# Altium PCB Круглов_ИУ4-83Б_ДЗ_БП.PcbDoc
Units mm, origin at the board's own origin, x right, y up, seen from the top; angles counter-clockwise.
Board outline 87.5 x 50 mm, 2 copper layers (Top Layer, Bottom Layer), stack 2.071 mm thick; 18 components, 15 nets, 64 pads, 11 vias.
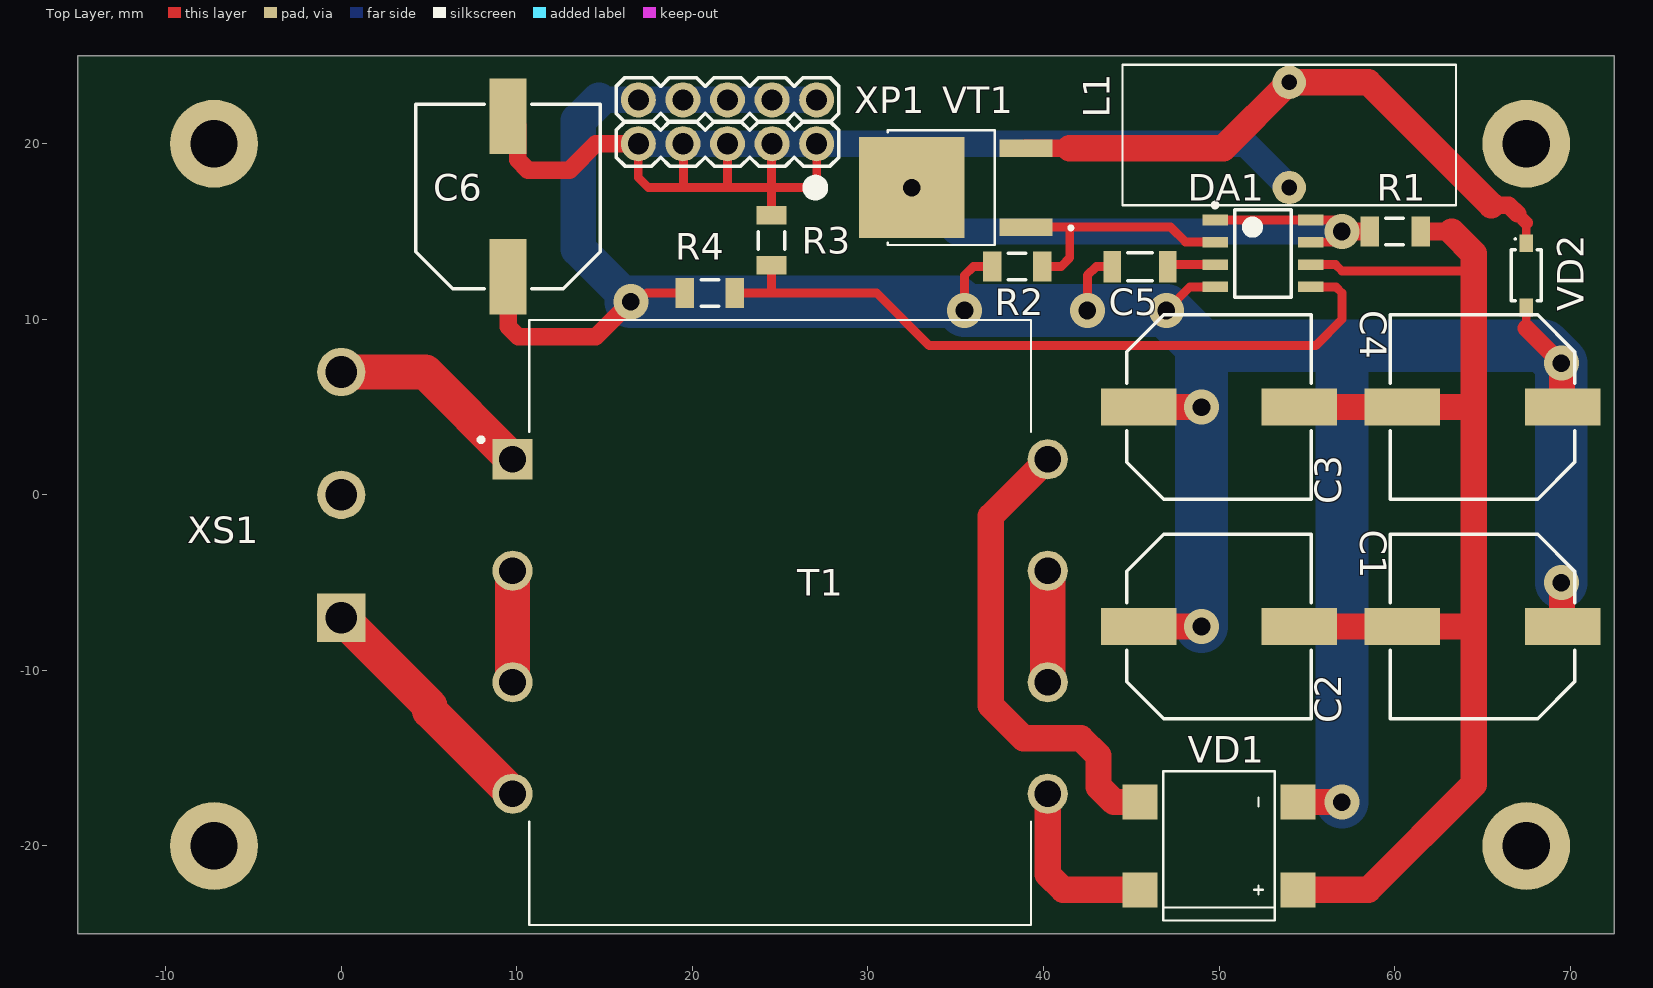
[diagram p0: Top Layer view]
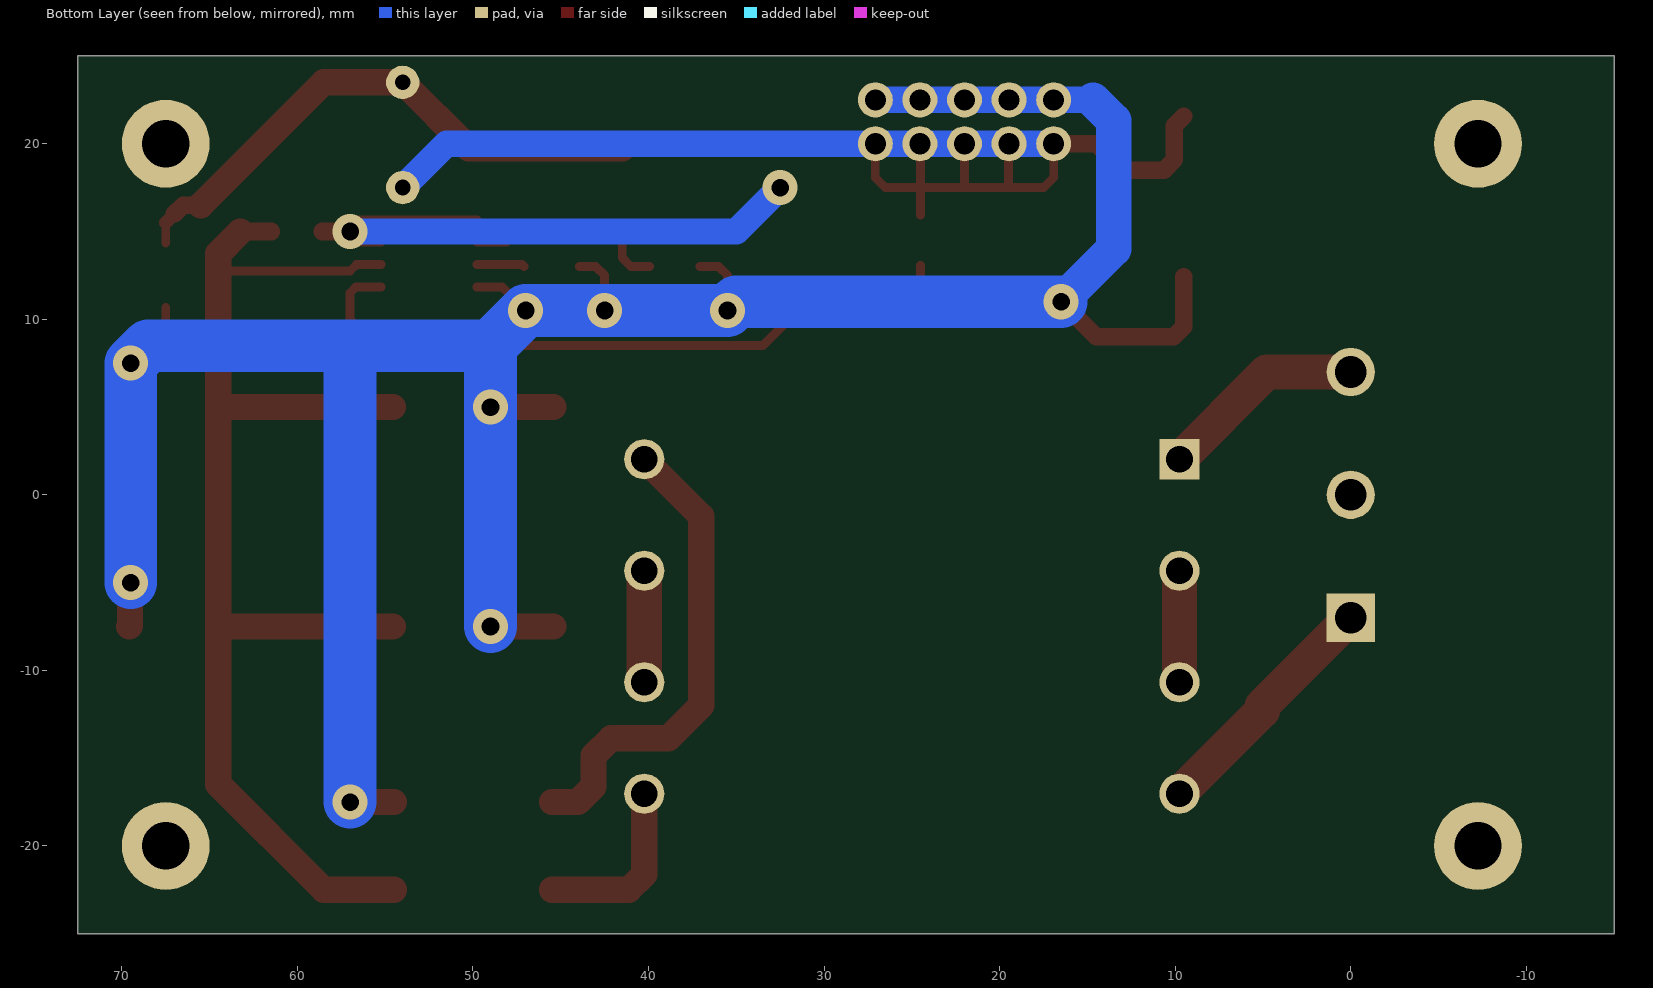
[diagram p1: Bottom Layer view, seen from below]

## Layer stack, top to bottom
Top Solder: solder mask 0.0102, Solder Resist, Dk 3.5
Top Layer: signal copper 0.0356
Dielectric 1: dielectric 2, FR-4, Dk 4.8
Bottom Layer: signal copper 0.0356
Bottom Solder: solder mask 0.0102, Solder Resist, Dk 3.5

## Board outline
-15,-25 -15,25 72.5,25 72.5,-25

## Design rules (kind name [scope] priority, off if disabled: settings)
AcuteAngle [All] p1: minimum=3.50000000000000E+0001 checktracksonly=FALSE
BoardOutlineClearance "BoardOutlineClearance 1" [All] p1: gap=0.25 ignorepadtopadclearanceinfootprint=FALSE except(0: Arc-SplitContinuation Track-SplitContinuation SMDPad-SplitContinuation THPad-SplitContinuation Via-SplitContinuation Fill-SplitContinuation Poly-SplitContinuation Region-SplitContinuation Text-SplitContinuation) // Milling
BoardOutlineClearance "BoardOutlineClearance 2" [All] p2: gap=0.4 ignorepadtopadclearanceinfootprint=FALSE except(0: Arc-SplitContinuation Track-SplitContinuation SMDPad-SplitContinuation THPad-SplitContinuation Via-SplitContinuation Fill-SplitContinuation Poly-SplitContinuation Region-SplitContinuation Text-SplitContinuation) // V-Cut
Clearance "Clearance 3 Oz" [All] p1: gap=0.35 ignorepadtopadclearanceinfootprint=FALSE except(0.25: Arc-Hole Track-Hole SMDPad-Hole THPad-Hole Via-Hole Fill-Hole Poly-Hole Region-Hole Text-Hole)
Clearance "Clearance 2 Oz" [All] p2: gap=0.3 ignorepadtopadclearanceinfootprint=FALSE except(0.25: Arc-Hole Track-Hole SMDPad-Hole THPad-Hole Via-Hole Fill-Hole Poly-Hole Region-Hole Text-Hole)
Clearance "Clearance-1 1 Oz" [All] p3: gap=0.2 ignorepadtopadclearanceinfootprint=FALSE except(0.25: Arc-Hole Track-Hole SMDPad-Hole THPad-Hole Via-Hole Fill-Hole Poly-Hole Region-Hole Text-Hole) // Standart
Clearance "Clearance-2 1 Oz" [All] p4: gap=0.15 ignorepadtopadclearanceinfootprint=FALSE except(0.2: Arc-Fill Arc-Poly Track-Fill Track-Poly SMDPad-Fill SMDPad-Poly THPad-Fill THPad-Poly Via-Fill Via-Poly Fill-Fill Fill-Poly Poly-Poly; 0.25: Arc-Hole Track-Hole SMDPad-Hole THPad-Hole Via-Hole Fill-Hole Poly-Hole Region-Hole Text-Hole) // Advance
Clearance "Clearance-1 1/2 Oz" [All] p5: gap=0.125 ignorepadtopadclearanceinfootprint=FALSE except(0.2: Arc-Fill Arc-Poly Track-Fill Track-Poly SMDPad-SMDPad SMDPad-Fill SMDPad-Poly THPad-Fill THPad-Poly Via-Fill Via-Poly Fill-Fill Fill-Poly Poly-Poly Poly-Region Poly-Text; 0.25: Arc-Hole Track-Hole SMDPad-Hole THPad-Hole Via-Hole Fill-Hole Poly-Hole Region-Hole Text-Hole) // Standart
Clearance "Clearance-2 1/2 Oz" [All] p6: gap=0.1 ignorepadtopadclearanceinfootprint=FALSE except(0.15: Arc-Fill Arc-Poly Track-Fill Track-Poly SMDPad-SMDPad SMDPad-Fill SMDPad-Poly THPad-Fill THPad-Poly Via-Fill Via-Poly Fill-Fill Fill-Poly Poly-Poly Poly-Region Poly-Text; 0.25: Arc-Hole Track-Hole SMDPad-Hole THPad-Hole Via-Hole Fill-Hole Poly-Hole Region-Hole Text-Hole) // Advance
DiffPairsRouting "DiffPairsRouting 1 Oz" [All] p1: maxlimit=0.254 minlimit=0.2 mostfreqgap=0.254 toplayer_minwidth=0.2 toplayer_maxwidth=0.381 toplayer_prefwidth=0.381 bottomlayer_minwidth=0.2 bottomlayer_maxwidth=0.381 bottomlayer_prefwidth=0.381 maxuncoupledlength=12.7
DiffPairsRouting "DiffPairsRouting 1/2 Oz" [All] p2: maxlimit=0.254 minlimit=0.1 mostfreqgap=0.254 toplayer_minwidth=0.1 toplayer_maxwidth=0.381 toplayer_prefwidth=0.381 bottomlayer_minwidth=0.1 bottomlayer_maxwidth=0.381 bottomlayer_prefwidth=0.381 maxuncoupledlength=12.7
HoleSize "Minimum HoleSize" [IsPad] p1: absolutevalues=TRUE maxlimit=5.9 minlimit=0.6 maxpercent=80.000 minpercent=20.000
HoleSize "Minimum HoleSize VIA 1" [IsVia] p2: absolutevalues=TRUE maxlimit=5.9 minlimit=0.3 maxpercent=80.000 minpercent=20.000 // Standart
HoleSize "Minimum HoleSize VIA 2" [IsVia] p3: absolutevalues=TRUE maxlimit=5.9 minlimit=0.2 maxpercent=80.000 minpercent=20.000 // Advance
HoleToHoleClearance Hole2HoleClearance [All] p1: gap=0.25 allowstackedmicrovias=FALSE
MinimumAnnularRing "Minimum AR VIA Standart" [IsVia] p1: minimumring=0.15
MinimumAnnularRing "Minimum AR PAD Standart" [IsPAD] p2: minimumring=0.2
MinimumAnnularRing "Minimum AR VIA Advance" [IsVia] p3: minimumring=0.1
MinimumAnnularRing "Minimum AR PAD Advance" [IsPAD] p4: minimumring=0.15
MinimumSolderMaskSliver "SolderMask Bridge Standart" [All] p1: minsoldermaskwidth=0.15 // All Masks
MinimumSolderMaskSliver "SolderMask Bridge Advance" [All] p2: minsoldermaskwidth=0.1 // Mask LDI
PlaneClearance "PlaneClearance 3 Oz" [All] p1: clearance=0.35
PlaneClearance "PlaneClearance 2 Oz" [All] p2: clearance=0.3
PlaneClearance "PlaneClearance 1 Oz" [All] p3: clearance=0.2
PlaneClearance "PlaneClearance-1 1/2 Oz" [All] p4: clearance=0.2 // Standart
PlaneClearance "PlaneClearance-2 1/2 Oz" [All] p5: clearance=0.15 // Advance
PlaneConnect "TermalConnect 3 Oz" [All] p1: planeconnectstyle=Relief reliefexpansion=0.2 reliefentries=4 reliefconductorwidth=0.35 reliefairgap=0.35 // Standart
PlaneConnect "TermalConnect 2 Oz" [All] p2: planeconnectstyle=Relief reliefexpansion=0.2 reliefentries=4 reliefconductorwidth=0.3 reliefairgap=0.3 // Standart
PlaneConnect "TermalConnect-1 1 Oz" [All] p3: planeconnectstyle=Relief reliefexpansion=0.2 reliefentries=4 reliefconductorwidth=0.2 reliefairgap=0.2 // Standart
PlaneConnect "TermalConnect-2 1 Oz" [All] p4: pad.planeconnectstyle=Relief pad.reliefexpansion=0.15 pad.reliefentries=4 pad.reliefconductorwidth=0.2 pad.reliefairgap=0.2 via.planeconnectstyle=Direct via.reliefexpansion=0.15 via.reliefentries=4 via.reliefconductorwidth=0.15 via.reliefairgap=0.15 // Advance
PlaneConnect "TermalConnect-1 1/2 Oz" [All] p5: planeconnectstyle=Relief reliefexpansion=0.2 reliefentries=4 reliefconductorwidth=0.2 reliefairgap=0.2 // Standart
PlaneConnect "TermalConnect-2 1/2 Oz" [All] p6: pad.planeconnectstyle=Relief pad.reliefexpansion=0.15 pad.reliefentries=4 pad.reliefconductorwidth=0.15 pad.reliefairgap=0.15 via.planeconnectstyle=Direct via.reliefexpansion=0.15 via.reliefentries=4 via.reliefconductorwidth=0.15 via.reliefairgap=0.15 // Advance
PolygonConnect "PolygonConnect 3 Oz" [All] p1: thpad.connectstyle=Relief thpad.reliefconductorwidth=0.35 thpad.reliefentries=4 thpad.polygonreliefangle="90 Angle" thpad.airgapwidth=0.35 smdpad.connectstyle=Relief smdpad.reliefconductorwidth=0.35 smdpad.reliefentries=4 smdpad.polygonreliefangle="90 Angle" smdpad.airgapwidth=0.35 via.connectstyle=Direct via.reliefconductorwidth=0.254 via.reliefentries=4 via.polygonreliefangle="90 Angle" via.airgapwidth=0.254
PolygonConnect "PolygonConnect 2 Oz" [All] p2: thpad.connectstyle=Relief thpad.reliefconductorwidth=0.3 thpad.reliefentries=4 thpad.polygonreliefangle="90 Angle" thpad.airgapwidth=0.3 smdpad.connectstyle=Relief smdpad.reliefconductorwidth=0.3 smdpad.reliefentries=4 smdpad.polygonreliefangle="90 Angle" smdpad.airgapwidth=0.3 via.connectstyle=Direct via.reliefconductorwidth=0.254 via.reliefentries=4 via.polygonreliefangle="90 Angle" via.airgapwidth=0.254
PolygonConnect "PolygonConnect-1 1 Oz" [All] p3: thpad.connectstyle=Relief thpad.reliefconductorwidth=0.2 thpad.reliefentries=4 thpad.polygonreliefangle="90 Angle" thpad.airgapwidth=0.2 smdpad.connectstyle=Relief smdpad.reliefconductorwidth=0.2 smdpad.reliefentries=4 smdpad.polygonreliefangle="90 Angle" smdpad.airgapwidth=0.2 via.connectstyle=Direct via.reliefconductorwidth=0.254 via.reliefentries=4 via.polygonreliefangle="90 Angle" via.airgapwidth=0.254 // Standart
PolygonConnect "PolygonConnect-2 1 Oz" [All] p4: thpad.connectstyle=Relief thpad.reliefconductorwidth=0.15 thpad.reliefentries=4 thpad.polygonreliefangle="90 Angle" thpad.airgapwidth=0.15 smdpad.connectstyle=Relief smdpad.reliefconductorwidth=0.15 smdpad.reliefentries=4 smdpad.polygonreliefangle="90 Angle" smdpad.airgapwidth=0.15 via.connectstyle=Direct via.reliefconductorwidth=0.254 via.reliefentries=4 via.polygonreliefangle="90 Angle" via.airgapwidth=0.254 // Advance
PolygonConnect "PolygonConnect-1 1/2 Oz" [All] p5: thpad.connectstyle=Relief thpad.reliefconductorwidth=0.15 thpad.reliefentries=4 thpad.polygonreliefangle="90 Angle" thpad.airgapwidth=0.2 smdpad.connectstyle=Relief smdpad.reliefconductorwidth=0.2 smdpad.reliefentries=4 smdpad.polygonreliefangle="90 Angle" smdpad.airgapwidth=0.2 via.connectstyle=Direct via.reliefconductorwidth=0.254 via.reliefentries=4 via.polygonreliefangle="90 Angle" via.airgapwidth=0.254 // Standart
PolygonConnect "PolygonConnect-2 1/2 Oz" [All] p6: thpad.connectstyle=Relief thpad.reliefconductorwidth=0.125 thpad.reliefentries=4 thpad.polygonreliefangle="90 Angle" thpad.airgapwidth=0.15 smdpad.connectstyle=Relief smdpad.reliefconductorwidth=0.125 smdpad.reliefentries=4 smdpad.polygonreliefangle="90 Angle" smdpad.airgapwidth=0.15 via.connectstyle=Direct via.reliefconductorwidth=0.254 via.reliefentries=4 via.polygonreliefangle="90 Angle" via.airgapwidth=0.254 // Advance
RoutingCorners [All] p1 off: cornerstyle=45-Degree minsetback=2.54 maxsetback=2.54
RoutingVias [All] p1: holewidth=0.3 width=0.6 viastyle="Through Hole" minholewidth=0.2 minwidth=0.4 maxholewidth=5.9 maxwidth=6.4
SilkToSilkClearance Silk2SilkClearance [All] p1 off: silktosilkclearance=0.15
SilkToSolderMaskClearance Silk2SolderMaskClearance [IsPad] p1 off: minsilkscreentomaskgap=0.15 clearancetoexposedcopper=TRUE
SolderMaskExpansion SolderMaskExpansion-1 [All] p1: expansion=0.05 istentingtop=FALSE // Standart
SolderMaskExpansion "SolderMaskExpansion LDI" [All] p2: expansion=0.025 istentingtop=FALSE // Advance
UnRoutedNet [All] p1: checkbadconnections=TRUE
Width "Width 3 Oz" [All] p1: maxlimit=10 minlimit=0.35 preferedwidth=0.4 checkconnectedcopper=TRUE
Width "Width 2 Oz" [All] p2: maxlimit=10 minlimit=0.3 preferedwidth=0.35 minimp=50.000000 maximp=50.000000 favimp=50.000000 checkconnectedcopper=TRUE
Width "Width 1 Oz" [All] p3: maxlimit=10 minlimit=0.15 preferedwidth=0.2 checkconnectedcopper=TRUE
Width "Width 1/2 Oz" [All] p4: maxlimit=10 minlimit=0.1 preferedwidth=0.125 checkconnectedcopper=TRUE
20 further rules are at their usual default settings.

## Components (designator, comment, footprint, x,y, rotation, side; value= is the part's Value field where it differs from the comment)
C1 "C_POL" C_SMD_Al_G 50,-7.5 r0 top
C2 "C_POL" C_SMD_Al_G 65,-7.5 r180 top
C3 "C_POL" C_SMD_Al_G 65,5 r180 top
C4 "C_POL" C_SMD_Al_G 50,5 r0 top
C5 "C" C_1206 45.5,13 r0 top
C6 "C_POL" C_SMD_Al_G 9.5,17 r90 top
DA1 "MC34063" SO8 52.5,13.75 r0 top
L1 "L" IND_HTTI-220-3.0 54,17.5 r270 top
R1 "R" R_1206#1 60,15 r0 top
R2 "R" R_1206#2 38.5,13 r0 top
R3 "R" R_1206#2 24.5,14.5 r90 top
R4 "R" R_1206#2 21,11.5 r0 top
T1 "T1-6_12-10" TRANSFORMER_FS24-1500 25,-7.5 r0 top
VD1 "DB201S" DIOB_DB107S 50,-20 r270 top
VD2 "VD" SOD123 67.5,12.5 r90 top
VT1 "NPN_BEC" TO229P990X238-3N 35,17.5 r180 top
XP1 "X_10" PLS-10 281.92,735 r180 top
XS1 "X_3" PCBCOMPONENT_1 -19.5,-25.4 r270 top

## Footprints (in the part's own frame and the unit in brackets; to place one, negate y for a bottom-side part, rotate by r counter-clockwise, add the part's x,y. Pads: shape width x height; smd on the part's side, far side on the other; paste and mask are expansions set on the pad)
C_1206 [mm] "Chip Capacitor, 2-Leads, Body 3.20x1.60mm, IPC Medium Density"
  rect 1x1.8 smd: 1(-1.575,0) 2(1.575,0)
  silkscreen extent -0.7,-0.8 0.7,0.8, body extent -1.75,-0.9 1.75,0.9, height 1.8
C_SMD_Al_G [mm] "Aluminum Electrolytic Capacitor, Body 10.30x10.30x10.50mm, IPC Medium Density"
  rect 4.3x2.1 smd: 1(-4.575,0) 2(4.575,0)
  silkscreen extent -5.25,-5.25 5.25,5.25, body extent -5.95,-5.25 5.95,5.25, height 10.5
DIOB_DB107S [mm]
  rect 2x2 smd: 1(-2.5,-4.5) 2(2.5,-4.5) NEG(-2.5,4.5) POS(2.5,4.5)
  silkscreen extent -4.25,-3.17 4.25,3.18, body extent -4.07,-4.95 4.07,4.95, height 2.7
IND_HTTI-220-3.0 [mm]
  round 1.9 hole 0.9: 1(-6,0) 2(0,0)
  silkscreen extent -7,-9.5 1,9.5, body extent -6.38,-9.5 0.38,9.5, height 19.5
PCBCOMPONENT_1 [mm]
  rect 2.75x2.75 hole 1.8 paste-1000 mask+0: 1(-18.4,19.5)
  round 2.75 hole 1.8 paste-1000 mask+0: 3(-32.4,19.5) EARTH(-25.4,19.5)
  round 5 hole 2.7 unplated paste-1000 mask+0: EARTH(-45.4,12.25) EARTH(-5.4,12.25)
  body extent -50.8,0 0,28.9, height 0.25
PLS-10 [mm]
  round 2 hole 1.2: 1(254.84,715) 2(254.84,712.5) 3(257.38,715) 4(257.38,712.5) 5(259.92,715) 6(259.92,712.5) 7(262.46,715) 8(262.46,712.5) 9(265,715) 10(265,712.5)
  silkscreen extent 253.57,711.23 266.27,717.86, body extent 253.57,711.23 266.27,716.27, height 8.44
R_1206#1 [mm] "Chip Resistor, 2-Leads, Body 3.10x1.60mm, IPC Medium Density"
  rect 1.05x1.7 smd: 1(-1.425,0) 2(1.5,0)
  silkscreen extent -0.5,-0.75 0.5,0.75, body extent -1.6,-0.85 1.6,0.85, height 0.65
R_1206#2 [mm] "Chip Resistor, 2-Leads, Body 3.10x1.60mm, IPC Medium Density"
  rect 1.05x1.7 smd: 1(-1.425,0) 2(1.425,0)
  silkscreen extent -0.5,-0.75 0.5,0.75, body extent -1.6,-0.85 1.6,0.85, height 0.65
SO8 [mm] "SOIC, 8-Leads, Body 4.90x3.90mm, Pitch 1.27mm, IPC Medium Density"
  rect 1.45x0.6 smd: 1(-2.725,1.905) 2(-2.725,0.635) 3(-2.725,-0.635) 4(-2.725,-1.905) 5(2.725,-1.905) 6(2.725,-0.635) 7(2.725,0.635) 8(2.725,1.905)
  silkscreen extent -2.85,-2.5 1.6,2.88, body extent -3,-2.5 3,2.5, height 1.75
SOD123 [mm] "SODFL, 2-Leads, Body 1.55x3.75mm, IPC Medium Density"
  rect 1x0.75 smd: 1(-1.827,0) 2(1.827,0)
  silkscreen extent -1.45,-0.85 2.12,0.85, body extent -1.88,-0.85 1.87,0.85, height 1.45
TO229P990X238-3N [mm]
  rect 3x1 smd: 1(-4,2.25) 2(-4,-2.25)
  rect 6x5.75 smd paste-4: 3(2.5,0)
  silkscreen extent -6.66,-3.27 3.87,3.27, body extent -5,-3.3 5,3.3, height 2.38
TRANSFORMER_FS24-1500 [mil]
  round 90 hole 60: 1(-600,-375) 2(-600,-125) 3(-600,125) 5(600,375) 6(600,125) 7(600,-125) 8(600,-375)
  rect 90x90 / inner round 90 / far side rect 90x90 hole 60: 4(-600,375)
  silkscreen extent -675,-669 562,688, body extent -610,-688 610,688, height 953

## Free pads (board coordinates)
  round 5 hole 2.7: EARTH(67.5,-20) EARTH(67.5,20)

## Via types
v1: diameter 2, hole 1, Top Layer to Bottom Layer, tented both sides, 11 vias

## Nets (pads, with @x,y where several pads share a name; then routed paths per layer and width w, separated by ;. In a path a pad name is that pad's centre, name@x,y a point inside that pad or via, vN(x,y) a via of type N, cw(c..) or ccw(c..) an arc to the next point about the centre after c; other vN are vias at no path point)
EARTH: 
GND: C1.1 C2.1 C3.1 C4.1 C5.1 C6.1 DA1.4 R2.1 R4.1 VD1.NEG VD2.1 XP1.2 XP1.4 XP1.6 XP1.8 XP1.10 | length 178.2
  Top Layer w0.5: v1(16.5,11) 16.906,11 17.406,11.5 R4.1 ; v1(35.5,10.5) 35.5,12.5 36,13 R2.1 ; v1(42.5,10.5) 42.5,12.5 43,13 C5.1 ; v1(47,10.5) 48.345,11.845 DA1.4 ; 67.5,9.5 VD2.1
  Top Layer w1: C6.1 9.5,9.586 10.086,9 14.5,9 v1(16.5,11) ; 67.5,9.5 v1(69.5,7.5)
  Top Layer w1.5: C1.1 v1(49,-7.5) ; C4.1 v1(49,5) ; VD1.NEG v1(57,-17.5) ; v1(69.5,-5) 69.537,-5.037 69.537,-7.462 C2.1 ; v1(69.5,7.5) 69.537,7.463 69.537,5.038 C3.1
  Bottom Layer w1.5: 14.672,22.5 XP1.10 XP1.8 XP1.6 XP1.4 XP1.2
  Bottom Layer w2: 14.672,22.5 13.5,21.328 13.5,14 v1(16.5,11)
  Bottom Layer w3: v1(16.5,11) 35,11 v1(35.5,10.5) v1(42.5,10.5) v1(47,10.5) 49,8.5 ; v1(49,-7.5) v1(49,5) 49,8.5 ; v1(57,-17.5) 57,8.5 ; v1(69.5,-5) v1(69.5,7.5) 68.5,8.5 57,8.5 ; 49,8.5 57,8.5
NetC1_2: C1.2 C2.2 C3.2 C4.2 DA1.6 R1.2 VD1.POS | length 75.5
  Top Layer w0.5: DA1.6 56.635,13.115 57,12.75 64.5,12.75
  Top Layer w1: R1.2 63.25,15
  Top Layer w1.5: VD1.POS 58.5,-22.5 64.5,-16.5 64.5,-7.5 ; C1.2 C2.2 64.5,-7.5 ; C4.2 C3.2 64.5,5 ; 63.25,15 64.5,13.75 64.5,12.75 64.5,5 ; 64.5,-7.5 64.5,5
NetC5_2: C5.2 DA1.3 | length 2.7
  Top Layer w0.5: C5.2 47.19,13.115 DA1.3
NetC6_2: C6.2 L1.2 R3.2 XP1.1 XP1.3 XP1.5 XP1.7 XP1.9 | length 72.2
  Top Layer w0.5: XP1.9 16.92,18.08 17.5,17.5 19.5,17.5 ; XP1.7 19.5,19.96 19.5,17.5 ; XP1.5 22,17.5 ; R3.2 24.5,17.5 ; XP1.3 24.5,19.96 24.5,17.5 ; XP1.1 27.08,18.08 26.5,17.5 24.5,17.5 ; 19.5,17.5 22,17.5 ; 22,17.5 24.5,17.5
  Top Layer w1: C6.2 10.05,21.025 10.05,19.086 10.636,18.5 13,18.5 14.5,20 XP1.9
  Bottom Layer w1.5: XP1.9 XP1.7 XP1.5 XP1.3 XP1.1 51.5,20 L1.2
NetDA1_1: DA1.1 DA1.7 DA1.8 R1.1 VT1.3 | length 38.3
  Top Layer w0.5: v1(32.5,17.5) VT1.3@33.5,16.5 ; DA1.1 DA1.8 56.595,15.655 57.25,15 56.635,14.385 DA1.7
  Top Layer w1: v1@57.25,15 R1.1
  Bottom Layer w1.5: v1(32.5,17.5) 35,15 v1(57,15)
NetDA1_2: DA1.2 R2.2 VT1.1 | length 14.7
  Top Layer w0.5: VT1.1 41.5,15.25 ; R2.2 41,13 41.5,13.5 41.5,15.25 ; DA1.2 49.756,14.404 48.096,14.404 47.25,15.25 41.5,15.25
NetDA1_5: DA1.5 R3.1 R4.2 | length 41.4
  Top Layer w0.5: R4.2 24.5,11.5 ; R3.1 24.5,11.5 ; DA1.5 56.655,11.845 57,11.5 57,10 55.5,8.5 33.5,8.5 30.5,11.5 24.5,11.5
NetL1_1: L1.1 VD2.2 VT1.2 | length 34.5
  Top Layer w0.5: VD2.2 67.5,15.5
  Top Layer w0.75: 67,16 67.5,15.5
  Top Layer w1: VT1.2 41.5,19.75 ; 65.5,16.5 66.5,16.5 67,16
  Top Layer w1.5: 41.5,19.75 50.25,19.75 L1.1 58.5,23.5 65.5,16.5
NetT1_1: T1.4 XS1.3 | length 11.8
  Top Layer w2: XS1.3 4.785,7 T1.4
NetT1_2: T1.2 T1.3 | length 6.3
  Top Layer w2: T1.2 T1.3
NetT1_4: T1.1 XS1.1 | length 14.1
  Top Layer w2: XS1.1 5.04,-12.04 5.04,-12.305 T1.1
NetT1_5: T1.5 VD1.1 | length 27.2
  Top Layer w1.5: T1.5 37,-1.215 37,-12 38.863,-13.863 42.129,-13.863 43.133,-14.867 43.133,-16.621 44.012,-17.5 VD1.1
NetT1_6: T1.6 T1.7 | length 6.3
  Top Layer w2: T1.7 T1.6
NetT1_8: T1.8 VD1.2 | length 10.2
  Top Layer w1.5: T1.8 40.24,-21.621 41.119,-22.5 VD1.2
pads on no net: XS1.EARTH
copper on no net: | length 0.2
  Bottom Layer w3: -7.375,19.875 -7.25,20

## Silkscreen, mask and mechanical layers (free items; w line width, h text height)
Bottom Solder:
  the board outline again, w0.5